# Altium PCB PCB5.PcbDoc
Units mm, origin at the board's own origin, x right, y up, seen from the top; angles counter-clockwise.
Board outline 33.27 x 35.31 mm, 2 copper layers (Top Layer, Bottom Layer); 7 components, 8 nets, 84 pads, 6 vias.
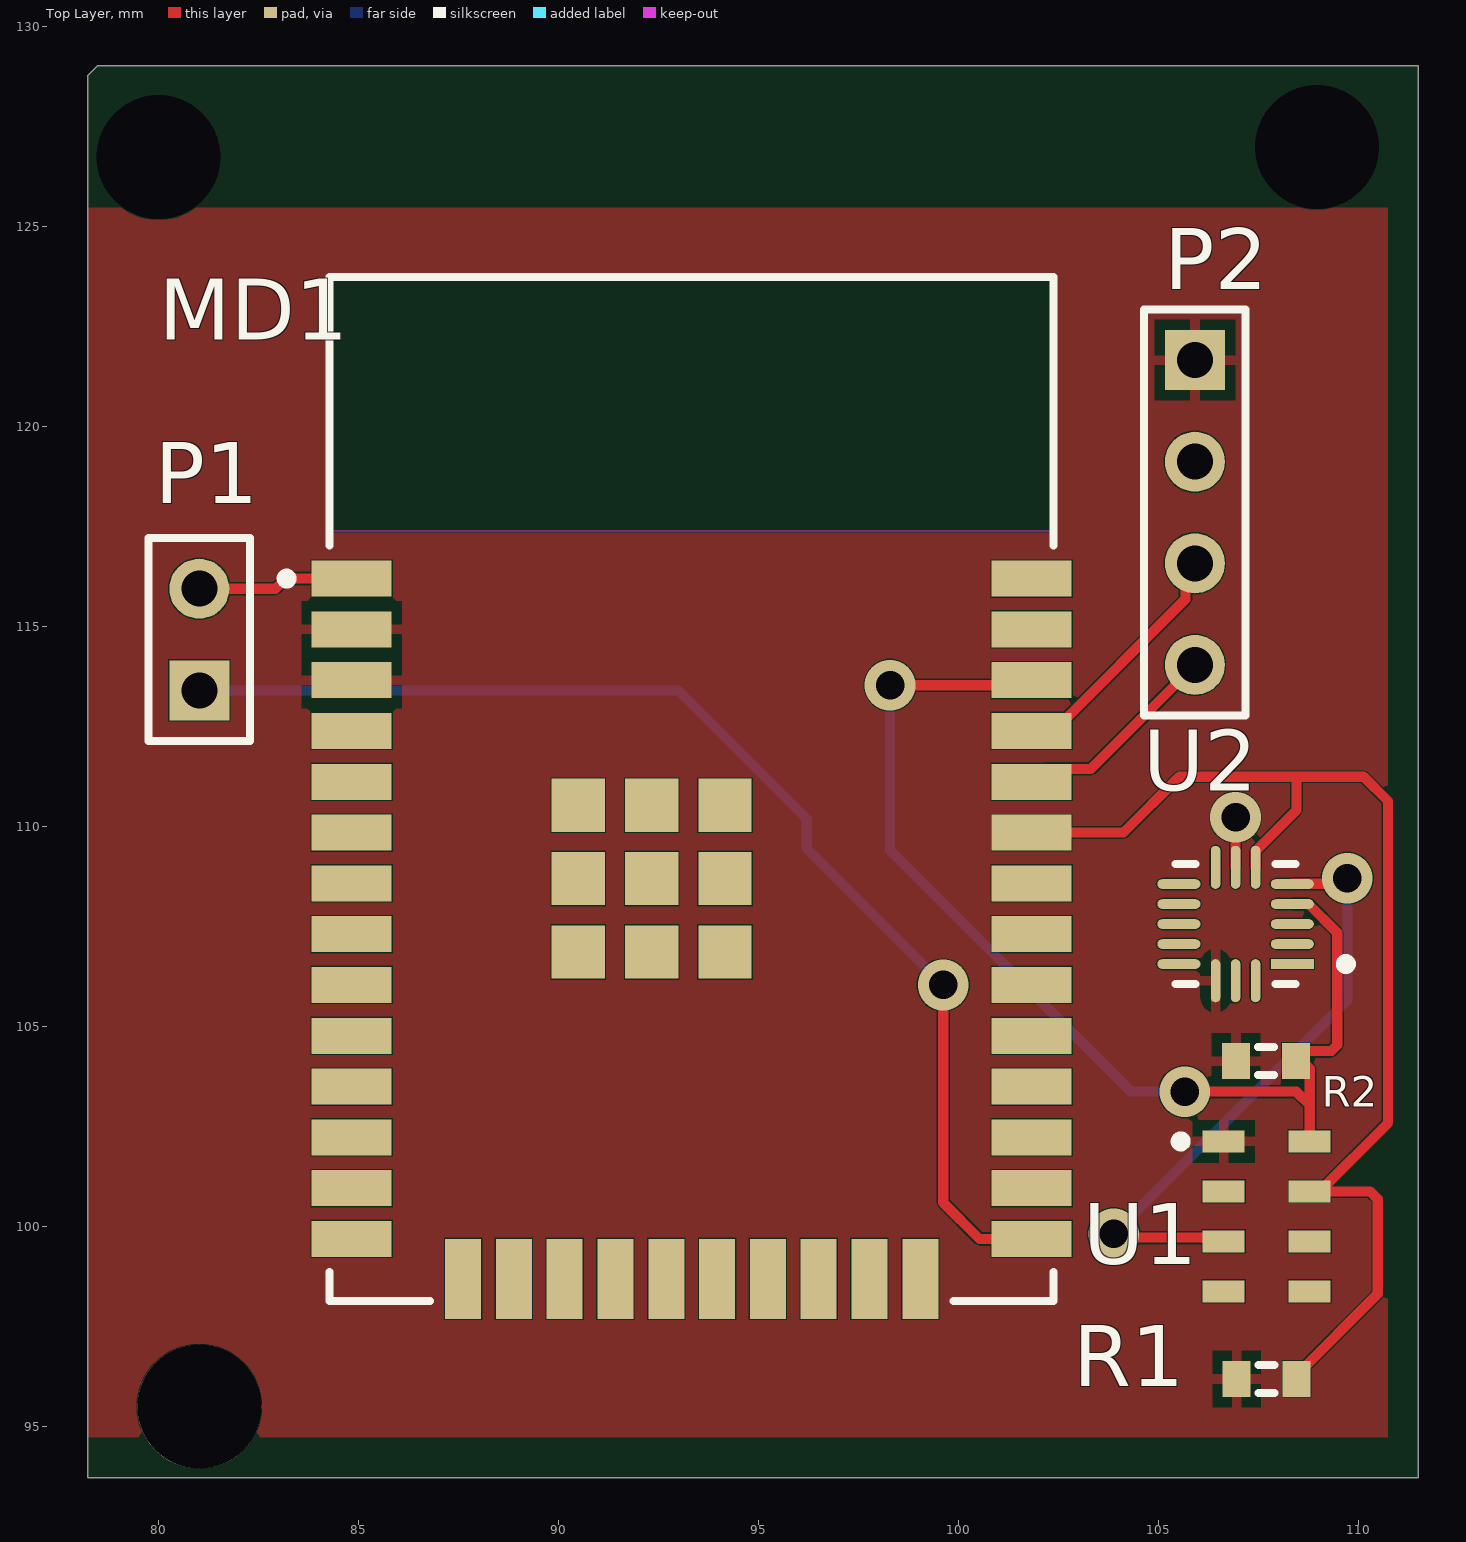
[diagram p0: Top Layer view]
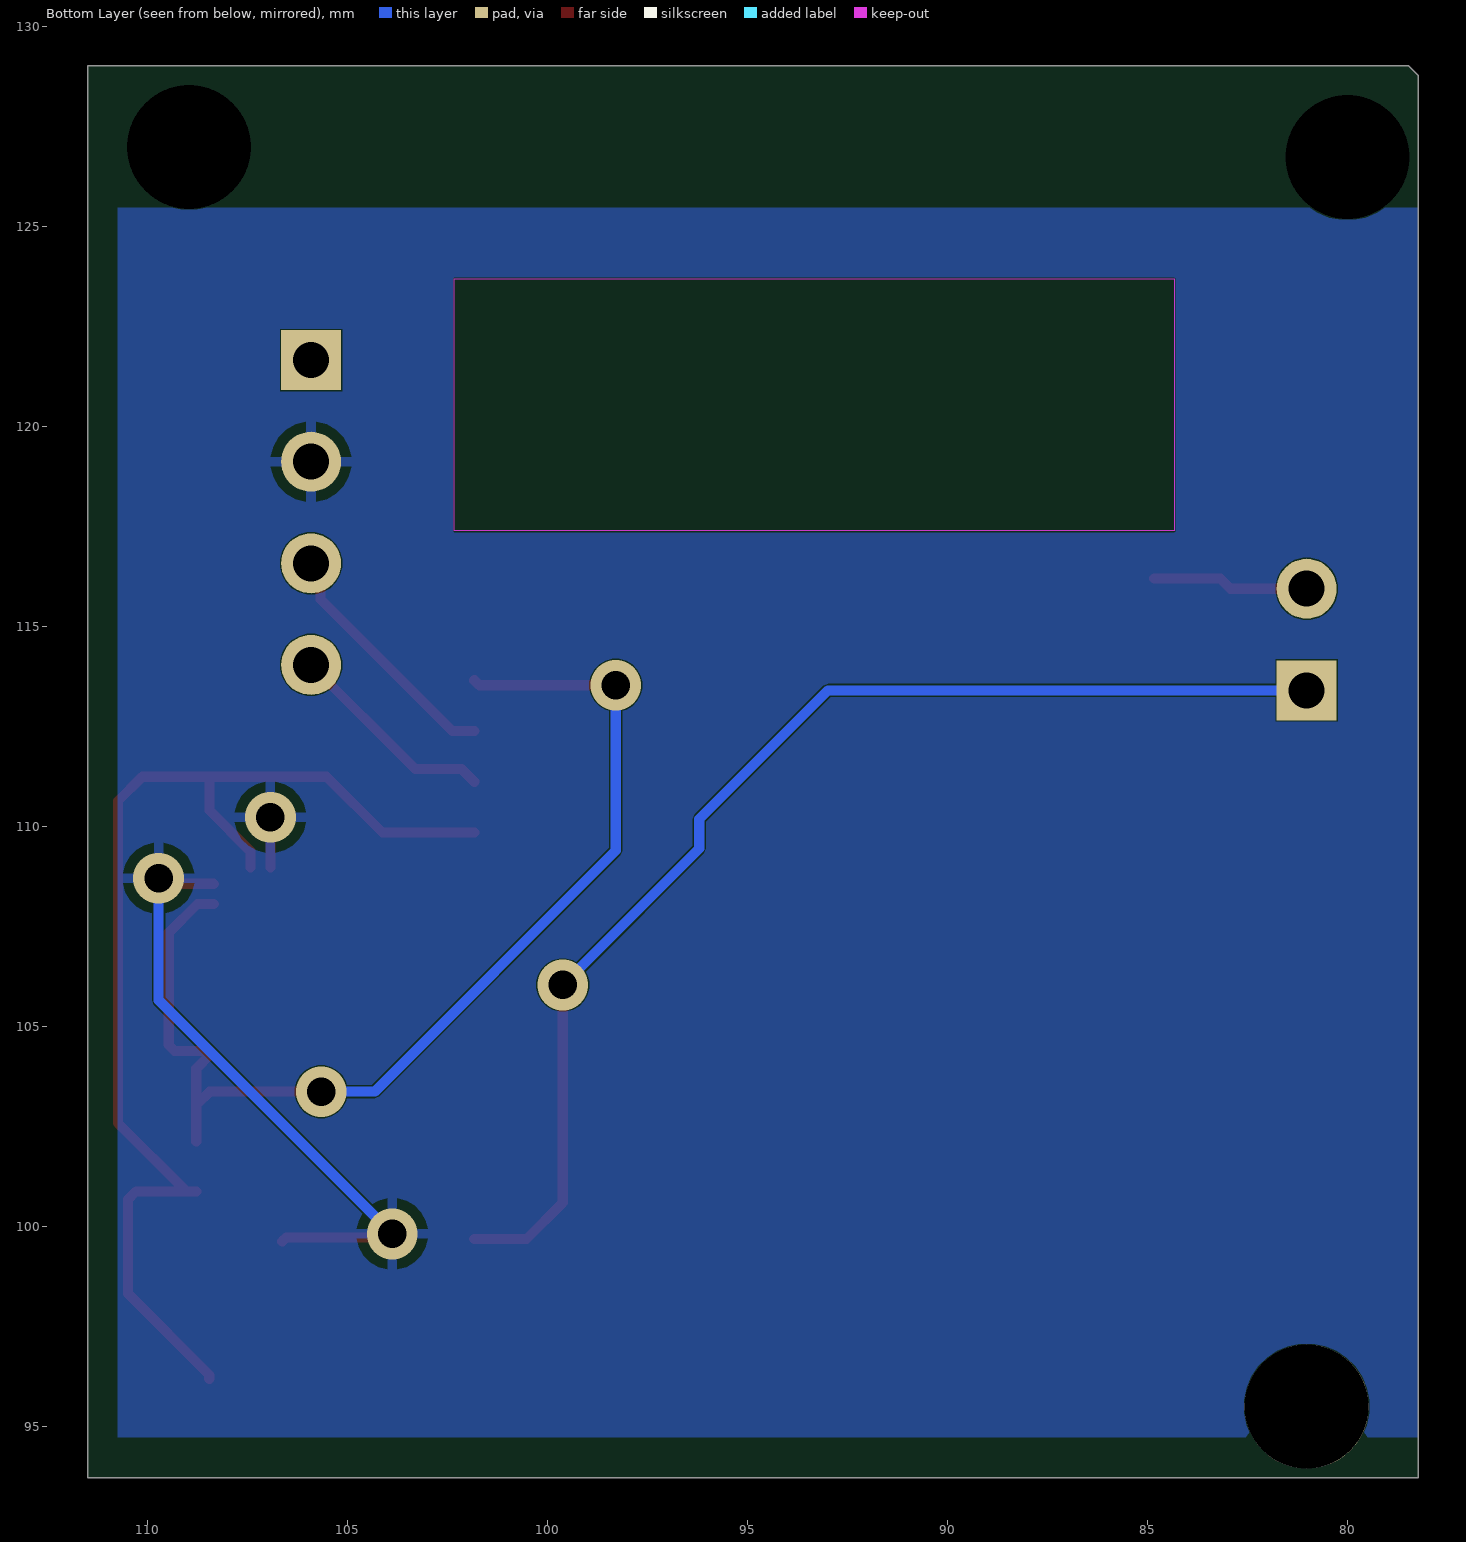
[diagram p1: Bottom Layer view, seen from below]

## Layer stack, top to bottom
Top Solder: solder mask 0.0102, Solder Resist, Dk 3.5
Top Layer: signal copper 0.0356
Dielectric 1: dielectric 0.32, FR-4, Dk 4.8
Bottom Layer: signal copper 0.0356
Bottom Solder: solder mask 0.0102, Solder Resist, Dk 3.5

## Board outline
78.232,128.778 78.486,129.032 111.506,129.032 111.506,93.726 78.232,93.726

## Design rules (kind name [scope] priority, off if disabled: settings)
Clearance [All] p1: gap=0.025 ignorepadtopadclearanceinfootprint=FALSE except(0: Arc-Hole Track-Hole SMDPad-Hole THPad-Hole Via-Hole Fill-Hole Poly-Hole Region-Hole Text-Hole)
PolygonConnect [All] p1: connectstyle=Relief reliefconductorwidth=0.254 reliefentries=4 polygonreliefangle="90 Angle" airgapwidth=0.254
RoutingVias [All] p1: holewidth=0.711 width=1.27 viastyle="Through Hole" minholewidth=0.711 minwidth=1.27 maxholewidth=0.711 maxwidth=1.27
SolderMaskExpansion [All] p1: expansion=0.102 istentingtop=FALSE
Width [All] p1: maxlimit=0.254 minlimit=0.051 preferedwidth=0.254 minimp=50.000000 maximp=50.000000 favimp=50.000000
30 further rules are at their usual default settings.

## Components (designator, comment, footprint, x,y, rotation, side; value= is the part's Value field where it differs from the comment)
MD1 "ESP32-WROOM-32" FP-ESP32-WROOM-32-MFG 93.336,110.945 r0 top
P1 "Header 2" HDR1X2 81.026,113.411 r90 top
P2 "Header 4" HDR1X4 105.918,121.666 r270 top
R1 "Res3" J1-0603 107.713,96.195 r0 top value=1K
R2 "Res3" J1-0603 107.696,104.14 r180 top value=1K
U1 "MPL3115A2" FRES-2153-01_V 107.713,100.259 r0 top
U2 "MMA8451QR1" FP-SOT1676-1-IPC_A 106.934,107.569 r180 top

## Footprints (in the part's own frame and the unit in brackets; to place one, negate y for a bottom-side part, rotate by r counter-clockwise, add the part's x,y. Pads: shape width x height; smd on the part's side, far side on the other; paste and mask are expansions set on the pad)
FP-ESP32-WROOM-32-MFG [mm]
  rect 2x0.9 smd paste+0 mask+0: 1(-8.5,5.26) 2(-8.5,3.99) 3(-8.5,2.72) 4(-8.5,1.45) 5(-8.5,0.18) 6(-8.5,-1.09) 7(-8.5,-2.36) 8(-8.5,-3.63) 9(-8.5,-4.9) 10(-8.5,-6.17) 11(-8.5,-7.44) 12(-8.5,-8.71) 13(-8.5,-9.98) 14(-8.5,-11.25) 25(8.5,-11.25) 26(8.5,-9.98) 27(8.5,-8.71) 28(8.5,-7.44) 29(8.5,-6.17) 30(8.5,-4.9) 31(8.5,-3.63) 32(8.5,-2.36) 33(8.5,-1.09) 34(8.5,0.18) 35(8.5,1.45) 36(8.5,2.72) 37(8.5,3.99) 38(8.5,5.26)
  rect 0.9x2 smd paste+0 mask+0: 15(-5.715,-12.25) 16(-4.445,-12.25) 17(-3.175,-12.25) 18(-1.905,-12.25) 19(-0.635,-12.25) 20(0.635,-12.25) 21(1.905,-12.25) 22(3.175,-12.25) 23(4.445,-12.25) 24(5.715,-12.25)
  rect 1.33x1.33 smd paste+0 mask+0: 39(-2.835,-4.075) 39(-2.835,-2.24) 39(-2.835,-0.405) 39(-1,-4.075) 39(-1,-2.24) 39(-1,-0.405) 39(0.835,-4.075) 39(0.835,-2.24) 39(0.835,-0.405)
  Keep-Out Layer region: -9,6.45 9,6.45 9,12.75 -9,12.75
  Keep-Out Layer region: -9,6.45 9,6.45 9,12.75 -9,12.75
  silkscreen extent -10.25,-12.8 9.05,12.8, body extent -9.6,-13.35 9.6,12.9, height 0.25
FP-SOT1676-1-IPC_A [mm]
  rect 1.077x0.239 smd paste+0 mask+0: 1(-1.418,1)
  rrect100% 1.077x0.239 smd paste+0 mask+0: 2(-1.418,0.5) 3(-1.418,0) 4(-1.418,-0.5) 5(-1.418,-1) 9(1.418,-1) 10(1.418,-0.5) 11(1.418,0) 12(1.418,0.5) 13(1.418,1)
  rrect100% 0.239x1.077 smd paste+0 mask+0: 6(-0.5,-1.418) 7(0,-1.418) 8(0.5,-1.418) 14(0.5,1.418) 15(0,1.418) 16(-0.5,1.418)
  silkscreen extent -2.88,-1.5 1.5,1.5
FRES-2153-01_V [mm] "LGA, 8-Leads, Body 5x3mm, Pitch 1.25mm"
  rect 1.05x0.55 smd: 1(-1.075,1.875) 2(-1.075,0.625) 3(-1.075,-0.625) 4(-1.075,-1.875) 5(1.075,-1.875) 6(1.075,-0.625) 7(1.075,0.625) 8(1.075,1.875)
  silkscreen extent -2.27,1.75 -2.02,2, body extent -1.5,-2.5 1.5,2.5, height 1.2
HDR1X2 [mm] "Connector; Header; 2 Position"
  rect 1.5x1.5 hole 0.9: 1(0,0)
  round 1.5 hole 0.9: 2(2.54,0)
  silkscreen extent -1.27,-1.27 3.81,1.27
HDR1X4 [mm] "Connector; Header; 4 Position"
  rect 1.5x1.5 hole 0.9: 1(0,0)
  round 1.5 hole 0.9: 2(2.54,0) 3(5.08,0) 4(7.62,0)
  silkscreen extent -1.27,-1.27 8.89,1.27
J1-0603 [mm] "Chip Resistor, Body 1.6x0.8mm, IPC High Density"
  rect 0.7x0.9 smd: 1(-0.75,0) 2(0.75,0)
  silkscreen extent -0.2,-0.35 0.2,0.35, body extent -0.85,-0.48 0.85,0.48, height 0.9

## Part data
MD1: library part CMP-194065-000008-1, "RX TXRX MOD WIFI SURFACE MOUNT", Case/Package=SMD/SMT, Frequency=2.5GHz, Max Operating Temperature=85°C, Min Operating Temperature=-40°C, Operating Supply Voltage=3.6V, Package Quantity=550, Data Rate=150Mbps, Mount="Surface Mount", Packaging="Cut Tape", Sensitivity=-98dBm, Weight=0.088185oz
P1: "Header, 2-Pin", LatestRevisionDate=17-Jul-2002, LatestRevisionNote="Re-released for DXP Platform.", Publisher="Altium Limited"
P2: "Header, 4-Pin", LatestRevisionDate=17-Jul-2002, LatestRevisionNote="Re-released for DXP Platform.", Publisher="Altium Limited"
R1 R2: "Resistor", LatestRevisionDate=29-May-2009, LatestRevisionNote="IPC-7351 Footprint Added.", PackageDescription="Chip Resistor", PackageReference=J1-0603, Published=8-Jun-2000, Publisher="Altium Limited"
U1: library part CMP-1261-00002-2, "Xtrinsic I2C Precision Altimeter, 1.95 to 3.6 V, -40 to 85 degC, 8-Pin LGA (2153-01), RoHS, Tray", Manufacturer="Freescale Semiconductor", Operating Temperature Range="-40 to 85 degC", ComponentLink1Description="Manufacturer URL", ComponentLink1URL=http://www.freescale.com/, ComponentLink2Description=Datasheet, ComponentLink2URL=http://cache.freescale.com/files/sensors/doc/data_sheet/MPL3115A2.pdf, ComponentLink3Description="Package Specification", ComponentLink3URL=http://cache.freescale.com/files/shared/doc/package_info/98ASA00260D.pdf, DatasheetVersion="Rev. 3.0", fSCL@20 pF="4 MHz Max.", fSCL@400 pF="400 KHz Max.", Mounting Technology="Surface Mount", PackageDescription="8-Pin Land Grid Array, Body 5 x 3 mm, Pitch 1.25 mm", PackageVersion="Rev. O", Packing=Tray, PartNumber=MPL3115A2, RoHS=TRUE, VDD="1.95 to 3.6 V", VDDIO="1.62 to 3.6 V"
U2: library part CMP-2000-06724-2, "ACCELEROMETER 2-8G I2C 16QFN", Case/Package=QFN, Max Operating Temperature=85°C, Max Supply Voltage=3.6V, Min Operating Temperature=-40°C, Min Supply Voltage=1.95V, Package Quantity=1000, Axis="X, Y, Z", Bandwidth=400Hz, Contact Plating=Gold, Depth=3mm, Interface=I2C, Length=3mm, Max Supply Voltage (DC)=3.6V, Min Supply Voltage (DC)=1.95V, Mount="Surface Mount", Number of Pins=16, Output Type=Digital, Packaging="Cut Tape", Radiation Hardening=No, REACH SVHC="No SVHC", Resolution=14b, Sensor Type="3 Axis", Weight=0.001122oz

## Free pads (board coordinates)
  round 3.1 hole 3.1: 2(81.026,95.504)
  round 1.524 hole 3.1: 3(108.966,127) 4(80.01,126.746)

## Via types
v1: diameter 1.27, hole 0.711, Top Layer to Bottom Layer, 6 vias

## Nets (pads, with @x,y where several pads share a name; then routed paths per layer and width w, separated by ;. In a path a pad name is that pad's centre, name@x,y a point inside that pad or via, vN(x,y) a via of type N, cw(c..) or ccw(c..) an arc to the next point about the centre after c; other vN are vias at no path point)
GND: P2.2 U1.3 U2.5 U2.7 | length 16.8
  Top Layer w0.254: v1(103.886,99.822) 103.98,99.728 106.544,99.728 U1.3 ; U2.7 v1(106.934,110.236) ; U2.5 108.359,108.576 109.592,108.576 v1(109.728,108.712)
  Bottom Layer w0.254: v1(103.886,99.822) 109.728,105.664 v1(109.728,108.712)
NetMD1_1: MD1.1 P1.2 | length 3.9
  Top Layer w0.254: P1.2 82.931,115.951 83.185,116.205 MD1.1
NetMD1_25: MD1.25 P1.1 | length 30.1
  Top Layer w0.254: v1(99.624,106.046) 99.624,100.604 100.533,99.695 MD1.25
  Bottom Layer w0.254: P1.1 92.993,113.411 96.211,110.193 96.211,109.458 v1(99.624,106.046)
NetMD1_33: MD1.33 R1.2 U1.7 U2.6 | length 30
  Top Layer w0.254: MD1.33 104.133,109.855 105.53,111.252 108.458,111.252 ; U2.6 107.434,109.391 108.458,110.415 108.458,111.252 ; R1.2 108.463,96.295 110.49,98.323 110.49,100.689 110.295,100.884 U1.7@109.038,100.884 ; U1.7 U1.7@109.038,100.884 ; 108.458,111.252 110.135,111.252 110.744,110.643 110.744,102.591 U1.7@109.038,100.884
NetMD1_34: MD1.34 P2.4 | length 5.3
  Top Layer w0.254: MD1.34 102.159,111.448 103.32,111.448 P2.4
NetMD1_35: MD1.35 P2.3 | length 6.2
  Top Layer w0.254: MD1.35 102.386,112.395 105.68,115.689 105.68,116.348 P2.3
NetMD1_36: MD1.36 R2.1 U1.8 U2.4 | length 28.6
  Top Layer w0.254: v1(98.298,113.538) 101.709,113.538 MD1.36 ; v1(105.664,103.378) 108.453,103.378 108.788,103.043 ; U2.4 108.756,108.069 109.474,107.351 109.474,104.543 109.325,104.394 108.446,104.394 108.446,104.294 108.788,103.952 108.788,103.043 ; U1.8 108.788,103.043
  Bottom Layer w0.254: v1(98.298,113.538) 98.298,109.406 104.326,103.378 v1(105.664,103.378)
VCC: MD1.2 MD1.3 P2.1 R1.1 R2.2 U1.1 U2.14
pads on no net: MD1.4 MD1.5 MD1.6 MD1.7 MD1.8 MD1.9 MD1.10 MD1.11 MD1.12 MD1.13 MD1.14 MD1.15 MD1.16 MD1.17 MD1.18 MD1.19 MD1.20 MD1.21 MD1.22 MD1.23 MD1.24 MD1.26 MD1.27 MD1.28 MD1.29 MD1.30 MD1.31 MD1.32 MD1.37 MD1.38 MD1.39 U1.2 U1.4 U1.5 U1.6 U2.1 U2.2 U2.3 U2.8 U2.9 U2.10 U2.11 U2.12 U2.13 U2.15 U2.16

## Polygon pours and split planes (outlines as drawn)
VCC on Top Layer "VCC_L01_P000" (solid, pour order 0): 78.232,125.476 78.232,94.742 110.744,94.742 110.744,125.476
GND on Bottom Layer "GND_L02_P001" (solid, pour order 1): 78.232,125.476 78.232,94.742 110.744,94.742 110.744,125.476

## Silkscreen, mask and mechanical layers (free items; w line width, h text height)
Mechanical 1:
  lines w0.254: 78.232,94.488 ccw(c79.248,94.488) 79.248,93.472 110.49,93.472 ccw(c110.49,94.488) 111.506,94.488 111.506,127.762 ccw(c110.49,127.762) 110.49,128.778 79.248,128.778 ccw(c79.248,127.762) 78.232,127.762 78.232,94.488